# Altium PCB TURN PCB.PcbDoc (part 2 of 2)
Units mm, origin at the board's own origin, x right, y up, seen from the top; angles counter-clockwise.
Board outline 52.97 x 55 mm, 4 copper layers (Top Layer, Signal Layer 1, Signal Layer 2, Bottom Layer), stack 1.593 mm thick; 91 components, 69 nets, 300 pads, 173 vias.
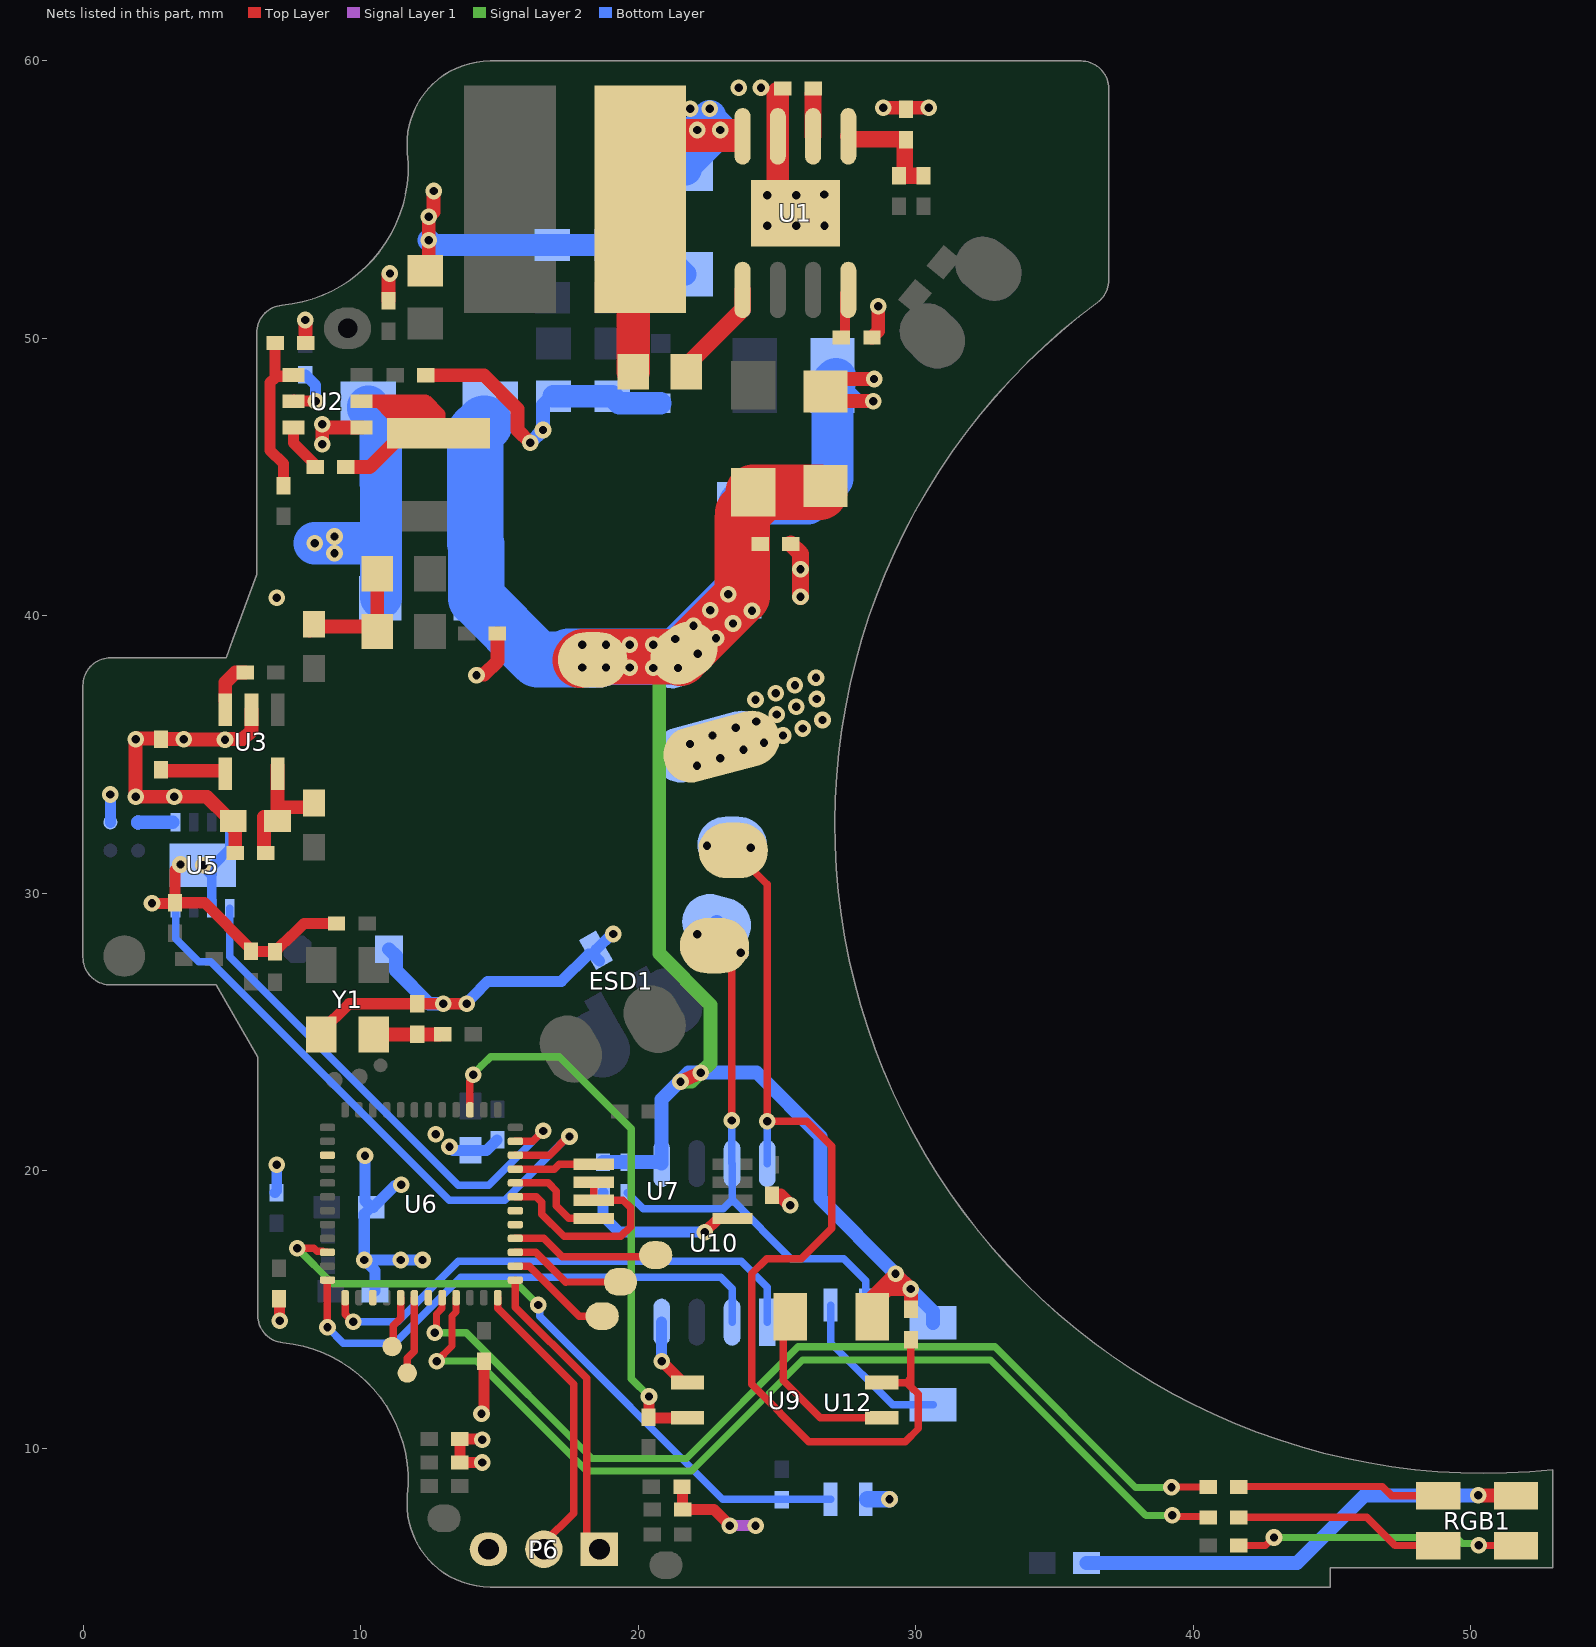
[diagram p4: the nets of this part, all layers, seen from the top]

## Via types
v1: diameter 0.6, hole 0.3, Top Layer to Bottom Layer, tented both sides, 173 vias

## Nets (pads, with @x,y where several pads share a name; then routed paths per layer and width w, separated by ;. In a path a pad name is that pad's centre, name@x,y a point inside that pad or via, vN(x,y) a via of type N, cw(c..) or ccw(c..) an arc to the next point about the centre after c; other vN are vias at no path point) (continued)
DGND: C2.2 C3.2 C7.2 C8.2 C9.2 C10.2 C11.2 C13.2 C14.2 C15.2 C16.2 C17.2 C18.2 C19.2 C20.2 C21.2 C22.1 C23.1 C25.1 C26.1 C27.1 C28.1 C29.1 C30.1 C31.1 C32.2 C35.1 C37.1 C38.1 C39.1 C40.2 C41.1 C48.2 C51.2 C52.2 C53.2 C55.2 C56.2 D5.1 D6.2 D7.2 D9.2 ESD1.3 P6.3 pad.1@22.635,35.288 pad.1@23.011,35.288 R7.2 R12.1 R16.2 R39.2 R52.2 R54.2 U1.7 U1.9 U2.1 U3.2 U5.2 U5.8 U5.9 U6.49 U7.5 U9.3 U10.4 U12.3 Y1.2 | length 140.8
  Top Layer w0.4: v1(2.481,29.638) 3.281,29.638 C32.2@3.306,29.663 ; v1(3.506,31.038) 3.306,30.838 C32.2@3.306,29.663 ; v1(7.081,14.592) C28.1@7.081,15.388 ; Y1.2@8.577,24.913 8.577,25.013 9.585,26.021 C22.1@12.041,26.021 v1(12.973,26.021) v1(13.831,26.021) ; C23.1@9.131,28.909 7.959,28.909 7.513,28.463 7.487,28.463 7.029,28.006 6.968,28.006 6.914,27.952 C41.1@6.914,27.891 6.903,27.902 6.067,27.902 R54.2@6.056,27.913 6.056,27.974 4.367,29.663 C32.2@3.306,29.663 ; v1(14.356,11.249) 14.356,11.303 14.441,11.388 C25.1@14.441,13.138 ; v1(14.38,9.488) C39.1@13.581,9.488 R52.2@13.581,10.338 14.356,10.338 v1(14.381,10.313) ; v1(20.851,13.138) 21.62,12.368 U9.3@21.781,12.368 ; C37.1@21.583,8.614 21.606,8.591 R39.2@21.606,7.788 22.731,7.788 v1(23.306,7.213) ; v1(22.401,17.788) 22.901,18.288 U7.5@23.401,18.288
  Top Layer w0.5: C21.2@2.806,35.557 v1(3.623,35.557) v1@3.65,35.557 ; C21.2@2.806,35.588 2.002,35.588 1.99,35.576 1.911,35.576 v1(1.892,35.557) v1(1.892,33.48) v1(3.281,33.48) 4.458,33.48 5.175,32.763 5.175,32.697 5.237,32.635 5.237,32.526 5.48,32.283 C51.2@5.48,31.454 ; v1@3.669,35.576 3.669,35.548 5.103,35.548 v1(5.112,35.538) 5.131,35.558 5.763,35.558 6.062,35.857 6.062,36.612 U3.2@6.067,36.617 ; v1(7.999,50.663) 8.007,50.654 8.007,49.842 8.011,49.838 R12.1@8.016,49.838 ; C19.2@8.168,39.473 C19.2@8.318,39.623 ; C19.2@8.318,39.703 C19.2@8.318,39.623 ; v1(8.616,46.189) v1@8.616,46.788 ; v1(8.616,46.909) v1@8.616,46.788 ; U2.1@10.031,46.788 v1@8.616,46.788 ; C9.2@10.598,41.517 C10.2@10.598,39.438 10.413,39.623 C19.2@8.318,39.623 ; C13.2@11.006,51.363 11.006,52.288 v1(11.056,52.338) ; C48.2@12.331,52.438 12.456,52.563 v1(12.456,53.538) v1(12.456,54.388) 12.631,54.563 v1(12.631,55.313) ; C7.2@12.356,48.674 14.449,48.674 15.66,47.463 15.66,46.694 v1(16.113,46.241) ; v1(14.174,37.864) 14.193,37.883 14.45,37.883 14.931,38.364 C8.2@14.931,39.368 ; C38.1@24.831,19.113 25.131,19.113 v1(25.481,18.763) ; R7.2@28.431,50.038 28.656,50.263 v1(28.656,51.163) ; v1(28.481,47.741) 27.303,47.741 26.756,48.288 27.006,48.538 v1(28.506,48.538) ; v1(28.833,58.313) v1(30.481,58.313)
  Top Layer w0.6: C3.2@25.502,42.598 25.856,42.244 v1(25.856,41.687) v1(25.856,40.688)
  Top Layer w0.8: v1(24.652,55.163) 25.025,55.163 U1.9@25.037,55.151 ; C18.2@25.037,58.844 U1.7@25.037,57.285 U1.9@25.037,55.151 ; U1.9@25.672,54.516 U1.9@25.037,55.151
  Signal Layer 1 w0.4: v1(23.306,7.213) v1(24.235,7.213)
  Bottom Layer w0.35: v1(4.331,31.013) 4.702,31.013 5.281,31.592 U5.8@5.281,32.563 ; U5.2@4.631,29.463 U5.9@4.631,30.688
  Bottom Layer w0.381: C30.1@6.914,19.213 6.977,19.276 v1(6.977,20.213)
  Bottom Layer w0.4: C35.1@0.981,32.56 v1(0.981,33.563) ; U5.9@4.306,31.013 U5.9@4.631,30.688 ; v1(10.156,20.538) 10.156,18.913 C29.1@10.381,18.688 ; C31.1@10.518,15.663 10.518,16.401 v1(10.131,16.788) ; C56.2@10.709,40.64 C56.2@10.73,40.661 ; v1(11.469,19.501) 11.431,19.462 11.235,19.462 10.461,18.688 C29.1@10.381,18.688 ; v1(12.231,16.788) v1(11.441,16.788) v1(10.131,16.788) ; v1(13.206,20.863) 13.331,20.738 C27.1@13.94,20.738 ; v1(13.831,26.021) 13.831,26.075 14.297,26.542 14.297,26.545 14.58,26.828 17.23,26.828 18.207,27.805 18.367,27.805 ESD1.3@18.606,27.566 ; C27.1@13.956,20.738 14.543,20.738 C26.1@14.918,21.113 ; ESD1.3@18.485,27.952 18.485,27.968 19.092,28.575 v1@19.101,28.575 ; C40.2@18.731,19.213 18.731,18.363 19.306,17.788 v1(22.401,17.788) ; U10.4@20.847,14.543 20.851,14.539 v1(20.851,13.138) ; v1(10.131,16.788) 10.131,18.438 C29.1@10.381,18.688
  Bottom Layer w0.5: D9.2@11.02,27.986 11.27,27.736 11.27,27.22 12.469,26.021 v1(12.973,26.021) ; v1(16.113,46.241) v1(16.571,46.698) 16.571,47.597 16.891,47.917 C17.2@16.956,47.917 ; v1(28.481,47.741) 27.928,47.741 27.131,48.538 v1(28.506,48.538)
  Bottom Layer w0.6: U12.3@28.256,8.163 v1(29.059,8.163)
  Bottom Layer w0.8: v1(12.456,53.538) 12.626,53.368 C14.2@16.909,53.368 C16.2@19.068,53.368 20.651,53.368 D6.2@21.706,52.313 ; C17.2@16.956,47.917 C15.2@19.068,47.917 19.318,47.667 D7.2@20.813,47.667
  Bottom Layer w1.524: v1(8.349,42.622) C55.2@10.73,42.622 ; D5.1@10.274,47.54 10.274,47.485 10.728,47.031 10.728,44.776 C53.2@10.73,44.774 C55.2@10.73,42.622 ; C56.2@10.73,40.661 C55.2@10.73,42.622 ; C52.2@23.652,44.059 23.654,44.061 26.113,44.061 27.006,44.954 27.006,48.413 C11.2@27.131,48.538
  other v1: 12.706,21.313 19.107,28.536 22.123,34.595 22.962,34.874 23.8,35.179 21.869,35.382 24.536,35.433 22.682,35.687 25.222,35.687 25.933,35.941 23.52,35.966 24.257,36.195 26.645,36.246 24.994,36.449 25.705,36.728 24.232,36.982 26.441,37.008 24.967,37.216 25.653,37.495 26.415,37.774 6.977,40.659 9.06,42.254 9.06,42.863 24.652,54.063 25.705,54.063 26.716,54.063 25.705,55.163 26.706,55.185 23.631,59.038 24.431,59.038
DI/O1: pad.1@23.387,31.763 pad.1@23.431,31.546 R37.2 U9.2 U10.8 | length 36.7
  Top Layer w0.27: pad.1@23.431,31.546 24.657,30.32 v1(24.657,21.787) 26.082,21.787 26.981,20.888 26.981,17.938 25.881,16.838 24.631,16.838 24.091,16.299 24.091,12.302 26.156,10.238 29.631,10.238 30.106,10.713 30.106,11.941 29.831,12.216 ; U9.2@28.781,12.368 29.679,12.368 ; R37.2@29.831,13.913 29.831,12.52 ; 29.679,12.368 29.831,12.52 ; 29.679,12.368 29.831,12.216 ; 29.831,12.216 29.831,12.52
  Bottom Layer w0.27: U10.8@24.657,20.258 v1(24.657,21.787)
  other v1: 24.056,31.638 22.481,31.714
DI/O2: pad.1@22.752,28.113 pad.1@22.831,28.913 R36.2 U10.7 U12.2 | length 21.9
  Top Layer w0.27: pad.1@22.752,28.113 23.387,27.478 23.381,27.472 v1(23.381,21.813)
  Bottom Layer w0.27: R36.2@19.612,19.213 20.187,18.638 23.073,18.638 23.387,18.952 ; v1(23.381,21.813) 23.381,20.264 U10.7@23.387,20.258 23.387,18.952 ; U12.2@28.206,15.163 28.206,16.038 27.406,16.838 25.501,16.838 23.387,18.952
  Bottom Layer w0.6: pad.1@22.831,28.913 22.831,28.738 v1(23.706,27.863)
  other v1: 22.131,28.524
FDCAN1_RX: U5.4 U6.46 | length 22.4
  Top Layer w0.27: U6.46@15.576,20.563 16.816,20.563 17.491,21.238 v1(17.531,21.238)
  Bottom Layer w0.27: U5.4@3.331,29.463 3.331,28.365 4.167,27.529 4.598,27.529 13.189,18.938 15.191,18.938 17.491,21.238 v1(17.531,21.238)
FDCAN1_TX: U5.1 U6.47 | length 18.4
  Top Layer w0.27: U6.47@15.576,21.063 16.206,21.063 v1(16.581,21.438)
  Bottom Layer w0.27: U5.1@5.281,29.463 5.281,27.71 13.517,19.473 14.616,19.473 v1(16.581,21.438)
GREEN: R56.2 U6.33 | length 36
  Top Layer w0.254: v1(12.743,13.138) 13.295,13.69 13.295,14.766 13.441,14.912 U6.33@13.441,15.428 ; v1(39.257,7.584) 39.296,7.545 40.507,7.545 R56.2@40.546,7.506
  Signal Layer 2 w0.254: v1(12.743,13.138) 14.191,13.138 18.149,9.18 21.931,9.18 25.928,13.177 32.706,13.177 38.299,7.584 v1(39.257,7.584)
MCU_DIN1: R33.1 U6.3 U9.4 | length 20.5
  Top Layer w0.27: U6.3@13.941,22.198 13.941,23.247 14.063,23.37 v1(14.063,23.459) ; R33.1@20.381,11.113 R33.1@20.395,11.098
  Top Layer w0.4: v1(20.395,11.866) 20.395,11.098 U9.4@21.781,11.098
  Signal Layer 2 w0.27: v1(14.063,23.459) 14.063,23.49 14.356,23.782 14.686,24.113 17.153,24.113 19.756,21.51 19.756,12.505 v1(20.395,11.866)
MCU_DIN2: R42.1 U6.22 U12.4 | length 24.3
  Top Layer w0.27: v1(7.715,17.209) 8.317,17.209 8.433,17.093 8.636,17.093 8.666,17.063 U6.22@8.806,17.063
  Signal Layer 2 w0.27: v1(7.715,17.209) 8.986,15.938 15.624,15.938 v1(16.399,15.163)
  Bottom Layer w0.27: v1(16.399,15.163) 16.449,15.113 16.449,14.757 23.043,8.163 25.177,8.163 U12.4@26.936,8.163
MCU_DOUT1: U6.25 U10.1 | length 18.5
  Top Layer w0.27: U6.25@9.441,15.428 9.441,14.828 9.705,14.563 v1(9.731,14.563)
  Bottom Layer w0.27: v1(9.731,14.563) 11.341,14.563 13.516,16.738 23.717,16.738 24.657,15.799 U10.1@24.657,14.543
MCU_DOUT2: U6.24 U10.2 | length 18.9
  Top Layer w0.27: v1(8.806,14.357) U6.24@8.806,16.063
  Bottom Layer w0.27: v1(8.806,14.357) 9.374,13.788 11.231,13.788 13.606,16.163 22.981,16.163 23.387,15.757 U10.2@23.387,14.543
MCU_VO_5V_EN: U6.41
MCU_VO_24V_EN: U6.42
NetC1_1: C1.1 U1.1 | length 3.8
  Top Layer w0.6: C1.1@21.73,48.801 21.73,49.008 23.767,51.045 U1.1@23.767,51.747
NetC1_2: C1.2 D6.1 L1.1 U1.8 | length 16
  Top Layer w1.2: C1.2@19.83,48.801 19.83,54.77 L1.1@20.084,55.024 20.084,56.266 21.131,57.313 22.956,57.313 23.431,57.313
  Bottom Layer w1.2: D6.1@21.706,56.113 D6.1@21.706,56.263 ; D6.1@21.706,56.263 22.543,57.101 v1(22.956,57.513) 22.581,57.888 22.581,57.988 22.531,57.938 21.706,57.113 D6.1@21.706,56.263
  other v1: 22.131,57.513 21.877,58.275 22.581,58.275
NetC5_1: C5.1 U2.6 | length 1.6
  Top Layer w0.4: U2.6@7.581,46.788 7.581,46.234 C5.1@8.316,45.499
NetC5_2: C5.2 L2.1 U2.2 | length 9.8
  Top Layer w0.5: C5.2@9.468,45.363 10.331,45.363 11.556,46.588 L2.1@12.806,46.588 12.806,47.263 ; U2.2@10.031,47.738 10.681,47.738 ; 10.681,47.738 12.331,47.738 12.806,47.263 ; 10.681,47.738 11.156,47.263 12.806,47.263
NetC12_2: C12.2 R9.2 R16.1 U1.5 | length 3.8
  Top Layer w0.6: U1.5@27.577,57.285 27.679,57.183 29.606,57.183 29.606,55.863 C12.2@30.028,55.863
NetC18_1: C18.1 U1.6 | length 1.5
  Top Layer w0.6: U1.6@26.307,57.285 C18.1@26.307,58.813
NetC20_1: C20.1 C51.1 F7.1 U3.5 | length 5.3
  Top Layer w0.5: C51.1@6.52,31.454 6.52,32.763 6.67,32.613 C20.1@7,32.613 ; C51.1@6.539,31.45 6.543,31.454 C51.1@6.58,31.454 ; 7,33.103 U3.5@7,34.595 ; C20.1@7.085,32.613 C20.1@7.005,32.613 7.005,33.103 8.166,33.103 8.316,33.253 F7.1@8.316,33.256
NetC21_1: C21.1 U3.4 | length 2.3
  Top Layer w0.5: C21.1@2.806,34.419 U3.4@5.112,34.419
NetC22_2: C22.2 R1.2 Y1.3 | length 2.4
  Top Layer w0.5: Y1.3@10.477,24.913 R1.2@12.848,24.913
NetR4_2: R4.2 U2.5 | length 1.9
  Top Layer w0.4: U2.5@7.601,47.785 7.648,47.738 v1(8.381,47.738)
  Bottom Layer w0.4: R4.2@8.006,48.688 8.381,48.313 v1(8.381,47.738)
NetR6_1: R6.1 R12.2 U2.4 | length 6.3
  Top Layer w0.4: R12.2@7.031,49.784 6.977,49.838 R12.2@6.916,49.838 6.916,48.581 ; R6.1@7.213,44.687 7.213,45.485 6.739,45.959 6.739,48.404 6.916,48.581 ; U2.4@7.581,48.688 7.531,48.638 6.973,48.638 6.916,48.581
NetR7_1: R7.1 U1.4 | length 1.8
  Top Layer w0.35: R7.1@27.331,50.063 27.456,50.188 27.456,51.626 U1.4@27.577,51.747
NetR21_2: R21.2 U3.3 | length 1.5
  Top Layer w0.5: U3.3@5.122,36.945 5.122,37.596 5.486,37.96 R21.2@5.841,37.96
NetR32_1: R32.1 U9.1 | length 6.6
  Top Layer w0.27: R32.1@25.223,14.913 25.223,12.446 26.57,11.098 U9.1@28.781,11.098
NetR41_1: R41.1 U12.1 | length 6
  Bottom Layer w0.27: U12.1@26.936,15.163 26.936,13.808 29.181,11.563 R41.1@30.631,11.563
NetR55_1: R55.1 RGB1.1 | length 7.3
  Top Layer w0.254: R55.1@41.672,8.615 46.835,8.615 47.161,8.289 RGB1.1@48.84,8.289
NetR56_1: R56.1 RGB1.3 | length 7.3
  Top Layer w0.254: R56.1@41.664,7.514 46.262,7.514 47.287,6.489 RGB1.3@48.564,6.489
NetR57_1: R57.1 RGB1.4 | length 10.4
  Top Layer w0.254: R57.1@41.652,6.5 42.607,6.5 v1@42.891,6.784 ; v1(50.293,6.5) 51.314,6.5 RGB1.4@51.647,6.166
  Top Layer w0.5: v1@42.891,6.784 v1(42.918,6.784)
  Signal Layer 2 w0.254: v1(42.918,6.784) 49.485,6.784 49.703,6.566 50.227,6.566 v1(50.293,6.5)
NetR58_1: R58.1 RGB1.2 | length 16.6
  Top Layer w0.5: v1(50.286,8.303) 50.293,8.296 51.633,8.296 RGB1.2@51.64,8.289 RGB1.2@51.693,8.342
  Bottom Layer w0.5: R58.1@36.162,5.863 43.745,5.863 46.185,8.303 v1(50.286,8.303)
NetR98_1: R98.1 U5.5 | length 1.3
  Bottom Layer w0.5: R98.1@1.983,32.554 1.992,32.563 U5.5@3.231,32.563
PA8: pad.1@11.681,12.713 U6.30 | length 2.8
  Top Layer w0.27: pad.1@11.681,12.713 11.681,13.242 11.941,13.502 U6.30@11.941,15.428
PA9: U6.31
PB14: U6.27
PC6: pad.1@11.136,13.666 U6.29 | length 1.9
  Top Layer w0.27: pad.1@11.136,13.666 11.174,13.704 11.174,14.421 11.441,14.688 U6.29@11.441,15.428
RED: R55.2 U6.32 | length 34.9
  Top Layer w0.254: v1@12.668,14.243 12.731,14.306 12.731,14.844 12.933,15.046 12.933,15.42 U6.32@12.941,15.428 ; v1(39.225,8.591) 39.233,8.6 40.534,8.6 R55.2@40.542,8.608
  Top Layer w0.305: v1(12.668,14.163) v1@12.668,14.243
  Signal Layer 2 w0.254: v1(12.668,14.163) 13.808,14.163 18.337,9.634 21.743,9.634 25.768,13.659 32.866,13.659 37.934,8.591 v1(39.225,8.591)
SWCLK: P6.1 U6.37 | length 10.9
  Top Layer w0.27: U6.37@15.576,16.063 15.576,15.088 18.145,12.519 18.145,6.385 P6.1@18.274,6.256
SWDIO: P6.2 U6.36 | length 10.4
  Top Layer w0.27: U6.36@14.941,15.428 14.941,15.044 17.675,12.31 17.675,7.657 P6.2@16.606,6.588
UART_DE: U6.43 U7.2 U7.3 | length 7.9
  Top Layer w0.27: U6.43@15.576,19.063 16.331,19.063 16.531,18.863 16.531,18.438 17.331,17.638 19.381,17.638 19.731,17.988 19.731,18.663 19.456,18.938 U7.3@18.401,18.938 U7.2@18.401,19.588
USART1_RX: U6.45 U7.1 | length 2.9
  Top Layer w0.27: U6.45@15.576,20.063 16.981,20.063 17.156,20.238 U7.1@18.401,20.238
USART1_TX: U6.44 U7.4 | length 3.7
  Top Layer w0.27: U6.44@15.576,19.563 16.765,19.563 17.056,19.273 17.056,18.738 17.506,18.288 U7.4@18.401,18.288
USART3_DE: pad.1@18.706,14.763 U6.38 | length 3.9
  Top Layer w0.27: U6.38@15.576,16.563 16.081,16.563 17.881,14.763 pad.1@18.706,14.763
USART3_RX: pad.1@20.635,16.963 U6.40 | length 5.3
  Top Layer w0.27: U6.40@15.576,17.563 16.606,17.563 17.269,16.9 pad.1@20.635,16.9
USART3_TX: pad.1@19.365,16 U6.39 | length 4.2
  Top Layer w0.27: U6.39@15.576,17.063 16.315,17.063 17.389,15.989 pad.1@19.365,16
VCC-IN: C2.1 C3.1 C40.1 C52.1 C53.1 C55.1 C56.1 D2.1 D5.2 pad.1@18.363,38.415 pad.1@21.435,38.531 pad.1@21.656,38.663 R32.2 R36.1 R37.1 R41.2 U10.5 | length 77.2
  Top Layer w0.5: v1(21.531,23.213) v1(22.256,23.538) ; R37.1@29.831,15.066 v1(29.831,15.738) ; 28.731,15.738 v1(29.281,16.288) v1(29.831,15.738) ; 28.731,15.738 29.006,15.738 ; 28.731,15.738 28.181,15.188 28.181,14.913 29.006,15.738 ; 29.006,15.738 v1(29.831,15.738)
  Top Layer w2: pad.1@17.907,38.405 18.022,38.52 20.549,38.52 21.336,38.52 21.512,38.52 pad.1@21.656,38.663 ; pad.1@21.514,38.481 23.749,40.716 23.749,43.51 ; D2.1@23.767,43.721 D2.1@24.148,44.102 ; D2.1@24.148,44.463 C2.1@26.541,44.463
  Signal Layer 2 w0.5: v1@20.582,38.919 20.601,38.938 21.08,38.938 21.29,39.148 21.317,39.148 21.342,39.122 21.368,39.148 21.382,39.148 21.427,39.103 21.641,39.103 22.061,38.683 22.072,38.683 22.155,38.6 22.155,38.589 22.131,38.589 22.13,38.587 22.13,38.536 21.738,38.145 21.484,38.145 21.465,38.125 v1(21.438,38.125) 21.411,38.125 21.259,37.974 21.057,37.974 20.764,37.681 20.764,27.826 22.606,25.984 22.606,23.889 v1(22.256,23.538) 21.931,23.213 v1(21.531,23.213)
  Bottom Layer w0.5: C40.1@18.731,20.313 R36.1@19.612,20.313 20.792,20.313 U10.5@20.847,20.258 20.847,22.571 21.814,23.538 v1(22.256,23.538) 24.277,23.538 26.57,21.245 26.57,18.998 v1(29.281,16.288) 30.631,14.938 R41.2@30.631,14.521
  Bottom Layer w2.032: D5.2@14.45,46.923 14.13,46.604 C53.1@14.13,44.774 C55.1@14.13,42.622 14.174,42.579 14.174,40.64 16.383,38.431 18.347,38.431 pad.1@18.363,38.415 ; pad.1@17.501,38.532 18.363,38.532 19.697,38.532 21.336,38.532 21.437,38.532 23.545,40.64 C52.1@23.597,40.64
  other v1: 17.993,38.138 18.845,38.138 19.697,38.138 20.549,38.125 22.149,38.633 17.993,38.964 18.845,38.964 19.697,38.964 20.549,38.964 21.336,39.167 22.809,39.192 21.996,39.649 23.419,39.726 24.105,40.183 22.606,40.208 23.249,40.781
VOUT_CURRENT: U6.15
pads on no net: U1.3 U6.2 U6.4 U6.6 U6.7 U6.13 U6.17 U6.18 U6.19 U6.26 U10.3 U10.6 Y1.1

## Polygon pours and split planes (outlines as drawn)
DGND on Signal Layer 2 "3G" (solid, remove dead copper, shelved, pour order 8): 37.556,60.163 11.756,60.413 -0.169,50.701 -0.294,28.329 3.559,28.333 6.167,31.438 7.597,32.713 26.997,32.713 37.487,51.314
D3.3V on Signal Layer 2 "BG" (solid, remove dead copper, shelved, pour order 0): 6.65,30.87 5.731,29.951 5.731,28.438 4.981,27.688 0.006,27.688 0.006,14.763 2.081,12.688 8.481,12.688 11.331,9.838 11.331,6.863 13.331,4.863 35.406,4.863 53.976,5 53.976,9.231 43.147,12.051 27.901,27.298 13.621,27.298 10.049,30.87
DGND on Bottom Layer "3G" (solid, remove dead copper, shelved, pour order 10): -0.619,55.988 -0.544,13.263 13.181,4.238 54.919,4.238 54.919,9.746 37.206,14.163 29.706,24.838 29.706,40.638 37.931,53.813 37.931,59.413 34.856,61.588 3.803,61.763
DGND on Signal Layer 1 "BG" (solid, remove dead copper, shelved, pour order 2): 12.456,60.413 5.806,53.763 1.306,53.763 -0.394,52.063 -0.394,15.163 10.081,4.688 35.406,4.688 54.415,4.199 54.415,9.431 30.872,20.213 30.872,43.801 37.406,52.098 37.406,59.213 35.906,60.713 12.747,60.713
DGND on Top Layer "GEND-P-001" (solid, remove dead copper, shelved, pour order 11): 13.094,60.713 40.338,60.713 40.395,60.656 40.395,45.432 32.58,37.617 32.58,21.438 42.765,11.253 53.976,11.253 53.976,2.958 54.067,2.867 53.976,2.776 7.215,2.776 -3.813,13.804 -3.813,52.843

## Keep-outs
Keep-Out Layer:
  lines w0.013: 10.723,32.5 ccw(c15.23,32.5) 19.737,32.5 ; 10.723,32.5 cw(c15.23,32.5) 19.737,32.5 ; 10.723,32.5 ccw(c15.23,32.5) 19.737,32.5 ; 10.723,32.5 cw(c15.23,32.5) 19.737,32.5 ; 15.736,43.5 cw(c18.993,43.5) 22.25,43.5 ; 15.736,43.5 ccw(c18.993,43.5) 22.25,43.5 ; 15.736,43.5 ccw(c18.993,43.5) 22.25,43.5 ; 15.736,43.5 cw(c18.993,43.5) 22.25,43.5 ; 15.736,43.5 ccw(c18.993,43.5) 22.25,43.5 ; 15.736,43.5 cw(c18.993,43.5) 22.25,43.5 ; 31.806,8.5 cw(c32.963,8.5) 34.12,8.5 ; 31.806,8.5 ccw(c32.963,8.5) 34.12,8.5 ; 31.806,8.5 ccw(c32.963,8.5) 34.12,8.5 ; 31.806,8.5 cw(c32.963,8.5) 34.12,8.5 ; 31.806,8.5 ccw(c32.963,8.5) 34.12,8.5 ; 31.806,8.5 cw(c32.963,8.5) 34.12,8.5 ; 31.806,56.5 cw(c32.963,56.5) 34.12,56.5 ; 31.806,56.5 ccw(c32.963,56.5) 34.12,56.5 ; 31.806,56.5 ccw(c32.963,56.5) 34.12,56.5 ; 31.806,56.5 cw(c32.963,56.5) 34.12,56.5 ; 31.806,56.5 ccw(c32.963,56.5) 34.12,56.5 ; 31.806,56.5 cw(c32.963,56.5) 34.12,56.5 ; -0.007,27.7 ccw(c0.993,27.7) 0.993,26.7 3.12,26.7 4.503,26.7 4.793,26.7 6.293,24.102 6.293,14.797 ccw(c7.293,14.797) 7.197,13.802 cw(c6.716,8.826) 11.688,8.309 ccw(c14.672,8) 14.672,5 44.954,5 44.954,5.7 47.992,5.7 52.964,5.7 52.964,9.231 cw(c50.494,32.5) 47.992,9.234 cw(c50.494,32.5) 36.559,51.299 ccw(c35.963,52.103) 36.963,52.103 36.963,59 ccw(c35.963,59) 35.963,60 14.672,60 ccw(c14.672,57) 11.688,56.691 cw(c6.714,56.175) 7.163,51.195 ccw(c7.252,50.199) 6.252,50.199 6.252,48.768 6.252,47.255 6.252,41.494 5.399,39.149 5.16,38.494 0.993,38.494 ccw(c0.993,37.494) -0.007,37.494 -0.007,27.7

## Other copper
Top Layer:
  pour cut-out: 32.97,54.5 cw(c32.97,56.5) 30.97,56.5 cw(c32.97,56.5) 32.97,58.5 cw(c32.97,56.5) 34.97,56.5 cw(c32.97,56.5)
  pour cut-out: 30.97,8.5 ccw(c32.97,8.5) 32.97,6.5 ccw(c32.97,8.5) 34.97,8.5 ccw(c32.97,8.5) 32.97,10.5 ccw(c32.97,8.5)
  pour cut-out: 30.97,8.5 ccw(c32.97,8.5) 32.97,6.5 ccw(c32.97,8.5) 34.97,8.5 ccw(c32.97,8.5) 32.97,10.5 ccw(c32.97,8.5)
  region net D12V: 28.539,54.144 28.119,53.724 28.119,52.991 28.431,52.513 29.456,52.513 29.977,52.939 29.977,53.989 29.456,54.509 29.066,54.509
  region net VCC-IN: 17.069,38.862 17.069,38.887 17.983,39.802 21.387,39.802 22.022,40.437 23.216,40.437 23.8,39.853 23.8,38.913 22.174,37.287 17.856,37.287 17.069,37.948
  region net DGND: 23.292,35.522 23.292,36.589 24.79,38.087 26.822,38.087 27,37.91 27,35.961 26.266,35.227 25.07,34.633 23.825,34.633
  pour cut-out: 23.007,38.05 18.693,34.884 17.24,36.337 17.008,38.939 17.852,40.014 18.502,40.172 21.267,40.198
  region net D3.3V: 7.934,31.656 7.213,30.936 7.213,29.71 7.363,29.56 8.438,29.56 9.063,30.185 9.063,31.29 8.697,31.656
  pour cut-out: 20.935,9.088 20.935,9.588 20.07,9.581 20.07,9.088
  pour cut-out: 8.194,26.218 8.781,26.218 8.781,27.684 8.406,27.863 8.181,27.738
  pour cut-out: 27.906,12.216 27.881,11.098 29.656,11.138 29.681,12.038 29.431,12.2
  pour cut-out: 17.156,23.077 16.946,23.077 16.778,23.245 14.756,26.738 21.476,32.813 23.681,32.857 24.756,32.013 24.913,31.363 24.923,30.263
  region net D24V: 23.711,49.543 22.656,48.488 22.656,47.229 23.297,46.588 24.656,46.588 24.991,46.923 24.991,47.683 25.037,47.729 25.037,49.202
  region net NetC1_2: 21.656,58.738 23.031,58.738 23.681,58.088 23.681,57.563 23.356,57.238 21.656,57.238
  region net D12V: 13.731,51.688 13.731,51.438 13.381,51.088 11.781,51.088 11.006,50.313 11.006,49.788 11.506,49.288 16.056,49.288 17.031,50.263 17.031,51.363
  text "'.Layer_Name'" at 68.806,32.688 h1
Signal Layer 1:
  region net D12V: 13.533,51.003 16.002,51.003 16.113,50.892 16.113,49.587 15.987,49.462 13.534,49.462 13.225,49.77 13.225,50.616
  region net NetC1_2: 21.615,58.623 21.336,58.344 21.336,57.458 21.706,57.088 23.194,57.088 23.419,57.313 23.419,58.021 23.012,58.427 22.816,58.623
  region net D24V: 22.962,48.92 22.481,48.44 22.481,47.166 23.165,46.482 24.79,46.482 24.79,46.495 24.994,46.698 24.994,48.514 24.587,48.92
  region net VCC-IN: 22.39,40.67 23.08,41.36 23.976,41.36 24.841,40.496 24.841,39.819 24.525,39.503
  region net VCC-IN: 17.089,38.888 17.74,39.815 21.526,39.815 22.439,40.727 23.296,41.308 24.422,40.87 24.574,39.561 22.314,37.3 17.615,37.3 17.089,37.826
  text "'.Layer_Name'" at 68.806,32.688 h1
Signal Layer 2:
  region net NetC1_2: 21.645,58.66 21.365,58.38 21.365,57.494 21.735,57.125 23.223,57.125 23.448,57.35 23.448,58.057 23.042,58.464 22.846,58.66
  region net D24V: 23.063,48.812 22.582,48.331 22.582,47.058 23.266,46.374 24.892,46.374 24.892,46.387 25.095,46.59 25.095,48.406 24.689,48.812
  region net VCC-IN: 17.165,38.995 17.816,39.921 21.603,39.921 22.515,40.833 23.373,41.414 24.498,40.976 24.651,39.667 22.39,37.406 17.691,37.406 17.165,37.932
  region net VCC-IN: 22.515,40.833 23.206,41.524 24.102,41.524 24.967,40.659 24.967,39.983 24.651,39.667
  region net D12V: 13.503,50.952 16.009,50.952 16.009,50.895 16.286,50.617 16.286,49.748 15.992,49.454 13.538,49.454 13.23,49.762 13.23,50.608
  region net D12V: 28.539,54.144 28.119,53.724 28.119,52.991 28.431,52.513 29.456,52.513 29.977,52.939 29.977,53.989 29.456,54.509 29.066,54.509
  text "'.Layer_Name'" at 68.806,32.688 h1
Bottom Layer:
  pour cut-out: 32.97,54.5 cw(c32.97,56.5) 30.97,56.5 cw(c32.97,56.5) 32.97,58.5 cw(c32.97,56.5) 34.97,56.5 cw(c32.97,56.5)
  pour cut-out: 30.97,8.5 ccw(c32.97,8.5) 32.97,6.5 ccw(c32.97,8.5) 34.97,8.5 ccw(c32.97,8.5) 32.97,10.5 ccw(c32.97,8.5)
  region net D12V: 28.539,54.144 28.119,53.724 28.119,52.991 28.431,52.513 29.456,52.513 29.977,52.939 29.977,53.989 29.456,54.509 29.066,54.509
  region net NetC1_2: 21.412,58.318 21.717,58.623 22.936,58.623 23.597,57.963 23.597,57.125 23.368,56.896 21.387,56.896 21.133,57.252 21.133,57.912
  region net VCC-IN: 17.069,38.913 17.069,38.938 17.653,39.853 21.387,39.853 22.022,40.488 23.216,40.488 23.8,39.903 23.8,38.964 22.174,37.338 17.475,37.338 16.949,37.864
  region net DGND: 23.292,35.535 23.292,36.601 24.79,38.1 26.822,38.1 27,37.922 27,35.973 26.238,35.281 25.07,34.646 23.825,34.646
  pour cut-out: 15.899,39.369 15.86,37.156 17.374,36.144 18.991,35.013 23.477,37.594 23.477,37.711 23.782,38.303 21.56,40.013 19.66,40.363 17.928,40.809 15.899,39.869
  pour cut-out: 23.137,33.074 20.923,33.113 19.583,27.7 16.713,26.035 17.326,24.134 18.356,23.163 19.253,23.388 20.976,24.692 21.895,24.963 23.781,27.413 24.131,29.313 24.576,31.046 23.637,33.074
  region net D24V: 23.606,49.309 23.431,49.309 22.656,48.534 22.656,47.229 23.297,46.588 24.656,46.588 24.991,46.923 24.991,47.463
  text "'.Layer_Name'" at 68.806,32.688 h1

## Silkscreen, mask and mechanical layers (free items; w line width, h text height)
Top Overlay:
  lines w0.127: 0,6.5 0,5 1.715,5
Bottom Overlay:
  text "CANH" at 36.106,53.978 h1
  text "CANL" at 28.281,46.438 h1 r270
  text "V" at 18.981,38.088 h1.52
  text "G" at 25.456,37.113 h1.52
  text "IO1" at 24.431,28.638 h1 r270
  text "IO2" at 25.506,26.438 h1
  text "485B" at 24.881,24.138 h0.8
  text "485A" at 20.606,22.213 h0.8
  text "PG_V0" at 19.531,11.663 h1.5
  text "20240805" at 30.456,5.613 h1
Mechanical 1:
  circle w0.013: c19,43.5 r3.25
  circle w0.013: c32.97,56.5 r1.15
  circle w0.013: c32.97,8.5 r1.15
  lines w0.013: 10.723,32.5 cw(c15.23,32.5) 19.737,32.5 ; 10.723,32.5 ccw(c15.23,32.5) 19.737,32.5 ; 10.723,32.5 cw(c15.23,32.5) 19.737,32.5 ; 10.723,32.5 ccw(c15.23,32.5) 19.737,32.5 ; 10.723,32.5 ccw(c15.23,32.5) 19.737,32.5 ; 10.723,32.5 cw(c15.23,32.5) 19.737,32.5 ; 15.736,43.5 cw(c18.993,43.5) 22.25,43.5 ; 15.736,43.5 ccw(c18.993,43.5) 22.25,43.5 ; 15.736,43.5 cw(c18.993,43.5) 22.25,43.5 ; 15.736,43.5 ccw(c18.993,43.5) 22.25,43.5 ; 15.736,43.5 ccw(c18.993,43.5) 22.25,43.5 ; 15.736,43.5 cw(c18.993,43.5) 22.25,43.5 ; 15.736,43.5 ccw(c18.993,43.5) 22.25,43.5 ; 15.736,43.5 cw(c18.993,43.5) 22.25,43.5 ; 31.806,8.5 cw(c32.963,8.5) 34.12,8.5 ; 31.806,8.5 ccw(c32.963,8.5) 34.12,8.5 ; 31.806,8.5 cw(c32.963,8.5) 34.12,8.5 ; 31.806,8.5 ccw(c32.963,8.5) 34.12,8.5 ; 31.806,8.5 ccw(c32.963,8.5) 34.12,8.5 ; 31.806,8.5 cw(c32.963,8.5) 34.12,8.5 ; 31.806,8.5 ccw(c32.963,8.5) 34.12,8.5 ; 31.806,8.5 cw(c32.963,8.5) 34.12,8.5 ; 31.806,56.5 cw(c32.963,56.5) 34.12,56.5 ; 31.806,56.5 ccw(c32.963,56.5) 34.12,56.5 ; 31.806,56.5 cw(c32.963,56.5) 34.12,56.5 ; 31.806,56.5 ccw(c32.963,56.5) 34.12,56.5 ; 31.806,56.5 ccw(c32.963,56.5) 34.12,56.5 ; 31.806,56.5 cw(c32.963,56.5) 34.12,56.5 ; 31.806,56.5 ccw(c32.963,56.5) 34.12,56.5 ; 31.806,56.5 cw(c32.963,56.5) 34.12,56.5 ; -0.007,27.7 ccw(c0.993,27.7) 0.993,26.7 3.12,26.7 4.503,26.7 4.793,26.7 6.293,24.102 6.293,14.797 ccw(c7.293,14.797) 7.197,13.802 cw(c6.716,8.826) 11.688,8.309 ccw(c14.672,8) 14.672,5 44.954,5 44.954,5.7 47.992,5.7 52.964,5.7 52.964,9.231 cw(c50.494,32.5) 47.992,9.234 cw(c50.494,32.5) 36.559,51.299 ccw(c35.963,52.103) 36.963,52.103 36.963,59 ccw(c35.963,59) 35.963,60 14.672,60 ccw(c14.672,57) 11.688,56.691 cw(c6.714,56.175) 7.163,51.195 ccw(c7.252,50.199) 6.252,50.199 6.252,48.768 6.252,47.255 6.252,41.494 5.399,39.149 5.16,38.494 0.993,38.494 ccw(c0.993,37.494) -0.007,37.494 -0.007,27.7
  text "避空孔" at 12.21,31.656 h2.5
Mechanical 3:
  lines w0.013: 10.723,32.5 ccw(c15.23,32.5) 19.737,32.5 ; 10.723,32.5 cw(c15.23,32.5) 19.737,32.5 ; 10.723,32.5 ccw(c15.23,32.5) 19.737,32.5 ; 10.723,32.5 cw(c15.23,32.5) 19.737,32.5 ; 15.736,43.5 cw(c18.993,43.5) 22.25,43.5 ; 15.736,43.5 ccw(c18.993,43.5) 22.25,43.5 ; 15.736,43.5 ccw(c18.993,43.5) 22.25,43.5 ; 15.736,43.5 cw(c18.993,43.5) 22.25,43.5 ; 15.736,43.5 cw(c18.993,43.5) 22.25,43.5 ; 15.736,43.5 ccw(c18.993,43.5) 22.25,43.5 ; 31.806,8.5 cw(c32.963,8.5) 34.12,8.5 ; 31.806,8.5 ccw(c32.963,8.5) 34.12,8.5 ; 31.806,8.5 ccw(c32.963,8.5) 34.12,8.5 ; 31.806,8.5 cw(c32.963,8.5) 34.12,8.5 ; 31.806,8.5 cw(c32.963,8.5) 34.12,8.5 ; 31.806,8.5 ccw(c32.963,8.5) 34.12,8.5 ; 31.806,56.5 cw(c32.963,56.5) 34.12,56.5 ; 31.806,56.5 ccw(c32.963,56.5) 34.12,56.5 ; 31.806,56.5 ccw(c32.963,56.5) 34.12,56.5 ; 31.806,56.5 cw(c32.963,56.5) 34.12,56.5 ; 31.806,56.5 cw(c32.963,56.5) 34.12,56.5 ; 31.806,56.5 ccw(c32.963,56.5) 34.12,56.5 ; 47.992,5.7 44.954,5.7 44.954,5 14.672,5 cw(c14.672,8) 11.688,8.309 ccw(c6.716,8.826) 7.197,13.802 cw(c7.293,14.797) 6.293,14.797 6.293,24.102 4.793,26.7 4.503,26.7 3.12,26.7 0.993,26.7 cw(c0.993,27.7) -0.007,27.7 -0.007,37.494 cw(c0.993,37.494) 0.993,38.494 5.16,38.494 5.399,39.149 6.252,41.494 6.252,47.255 6.252,48.768 6.252,50.199 cw(c7.252,50.199) 7.163,51.195 ccw(c6.714,56.175) 11.688,56.691 cw(c14.672,57) 14.672,60 35.963,60 cw(c35.963,59) 36.963,59 36.963,52.103 cw(c35.963,52.103) 36.559,51.299 ccw(c50.494,32.5) 47.992,9.234 ; 47.992,5.7 47.992,9.234 ; 47.992,5.7 52.964,5.7 52.964,9.231 cw(c50.494,32.5) 47.992,9.234 ; 9.174,50.363 cw(c9.524,50.363) 9.874,50.363 cw(c9.524,50.363) 9.174,50.363 ; 14.224,6.363 cw(c14.599,6.363) 14.974,6.363 cw(c14.599,6.363) 14.224,6.363 ; 16.224,6.363 cw(c16.599,6.363) 16.974,6.363 cw(c16.599,6.363) 16.224,6.363 ; 18.224,6.363 cw(c18.599,6.363) 18.974,6.363 cw(c18.599,6.363) 18.224,6.363
Mechanical 12:
  circle w0.05: c32.97,56.5 r2
  circle w0.05: c32.97,8.5 r2
  circle w0.05: c32.97,56.5 r2
Drill Drawing:
  lines w0.254: 5.133,73.144 5.556,73.144 5.979,72.72 6.403,73.144 6.826,73.144 6.403,73.567 6.826,73.99 6.403,73.99 5.979,74.414 5.556,73.99 5.133,73.99 5.556,73.567 5.133,73.144 ; 5.133,78.224 6.826,78.224 5.979,76.53 5.133,78.224 ; 5.133,80.34 6.826,80.34 6.826,82.034 5.133,82.034 5.133,80.34
  lines w0.381: 3.614,71.577 278.975,71.577 ; 3.614,83.007 278.975,83.007 ; 17.606,67.767 17.606,86.817 ; 32.588,67.767 32.588,86.817 ; 60.52,67.767 60.52,86.817 ; 73.369,67.767 73.369,86.817 ; 92.008,67.767 92.008,86.817 ; 130.096,67.767 130.096,86.817 ; 145.079,67.767 145.079,86.817 ; 164.022,67.767 164.022,86.817 ; 188.399,67.767 188.399,86.817 ; 210.084,67.767 210.084,86.817 ; 243.958,67.767 243.958,86.817 ; 3.614,67.767 278.975,67.767 278.975,86.817 3.614,86.817 3.614,67.767
  text "Symbol" at 5.9,84.15 h1.83
  text "Count" at 18.749,84.15 h1.83
  text "Hole Size" at 33.731,84.15 h1.83
  text "Plated" at 61.663,84.15 h1.83
  text "Hole Type" at 74.512,84.15 h1.83
  text "Drill Layer Pair" at 93.151,84.15 h1.83
  text "Via/Pad" at 131.239,84.15 h1.83
  text "Pad Shape" at 146.222,84.15 h1.83
  text "Template" at 165.165,84.15 h1.83
  text "Description" at 189.542,84.15 h1.83
  text "Hole Tolerance (+)" at 211.227,84.15 h1.83
  text "Hole Tolerance (-)" at 245.101,84.15 h1.83
  text "1" at 18.749,80.34 h1.52
  text "27.56mil (0.700mm)" at 33.731,80.34 h1.52
  text "PTH" at 61.663,80.34 h1.52
  text "Round" at 74.512,80.34 h1.52
  text "Top Layer - Bottom Layer" at 93.151,80.34 h1.52
  text "Pad" at 131.239,80.34 h1.52
  text "Rounded" at 146.222,80.34 h1.52
  text "r150_170h70r100" at 165.165,80.34 h1.52
  text "3" at 18.749,76.53 h1.52
  text "29.53mil (0.750mm)" at 33.731,76.53 h1.52
  text "PTH" at 61.663,76.53 h1.52
  text "Round" at 74.512,76.53 h1.52
  text "Top Layer - Bottom Layer" at 93.151,76.53 h1.52
  text "Pad" at 131.239,76.53 h1.52
  text "(Mixed)" at 146.222,76.53 h1.52
  text "(Mixed)" at 165.165,76.53 h1.52
  text "173" at 18.749,72.72 h1.52
  text "11.81mil (0.300mm)" at 33.731,72.72 h1.52
  text "PTH" at 61.663,72.72 h1.52
  text "Round" at 74.512,72.72 h1.52
  text "Top Layer - Bottom Layer" at 93.151,72.72 h1.52
  text "Via" at 131.239,72.72 h1.52
  text "Rounded" at 146.222,72.72 h1.52
  text "v60h30m0mx0" at 165.165,72.72 h1.52
  text "177 Total" at 18.749,68.91 h1.52

## Text inside footprints (layer, text, board x,y; h text height)
D2: Top Overlay "+" at 23.681,42.138 h1.52 r90
RGB1: Top Overlay "R" at 47.573,8.659 h0.8 r180; Top Overlay "G" at 47.573,6.881 h0.8 r180; Top Overlay "B" at 53.669,6.881 h0.8 r180; Top Overlay "+" at 53.669,8.659 h0.8 r180
U6: Mechanical 14 "37" at 15.691,16.438 h0.75 r180; Mechanical 14 "36" at 15.291,15.788 h0.75 r180; Mechanical 14 "24" at 9.391,16.438 h0.75 r180; Mechanical 14 "12" at 9.741,22.313 h0.75 r180; Mechanical 14 "25" at 9.791,15.788 h0.75 r180; Mechanical 14 "49" at 12.716,19.138 h1 r180; Mechanical 14 "13" at 9.341,21.638 h0.75 r180; Mechanical 14 "48" at 15.666,21.663 h0.75 r180; Mechanical 14 "1" at 15.066,22.513 h0.75 r180